# Altium PCB StrainLogger.PcbDoc (part 2 of 2)
Units mm, origin at the board's own origin, x right, y up, seen from the top; angles counter-clockwise.
Board outline 45 x 79 mm, 2 copper layers (Top Layer, Bottom Layer), stack 1.58 mm thick; 171 components, 91 nets, 490 pads, 131 vias.
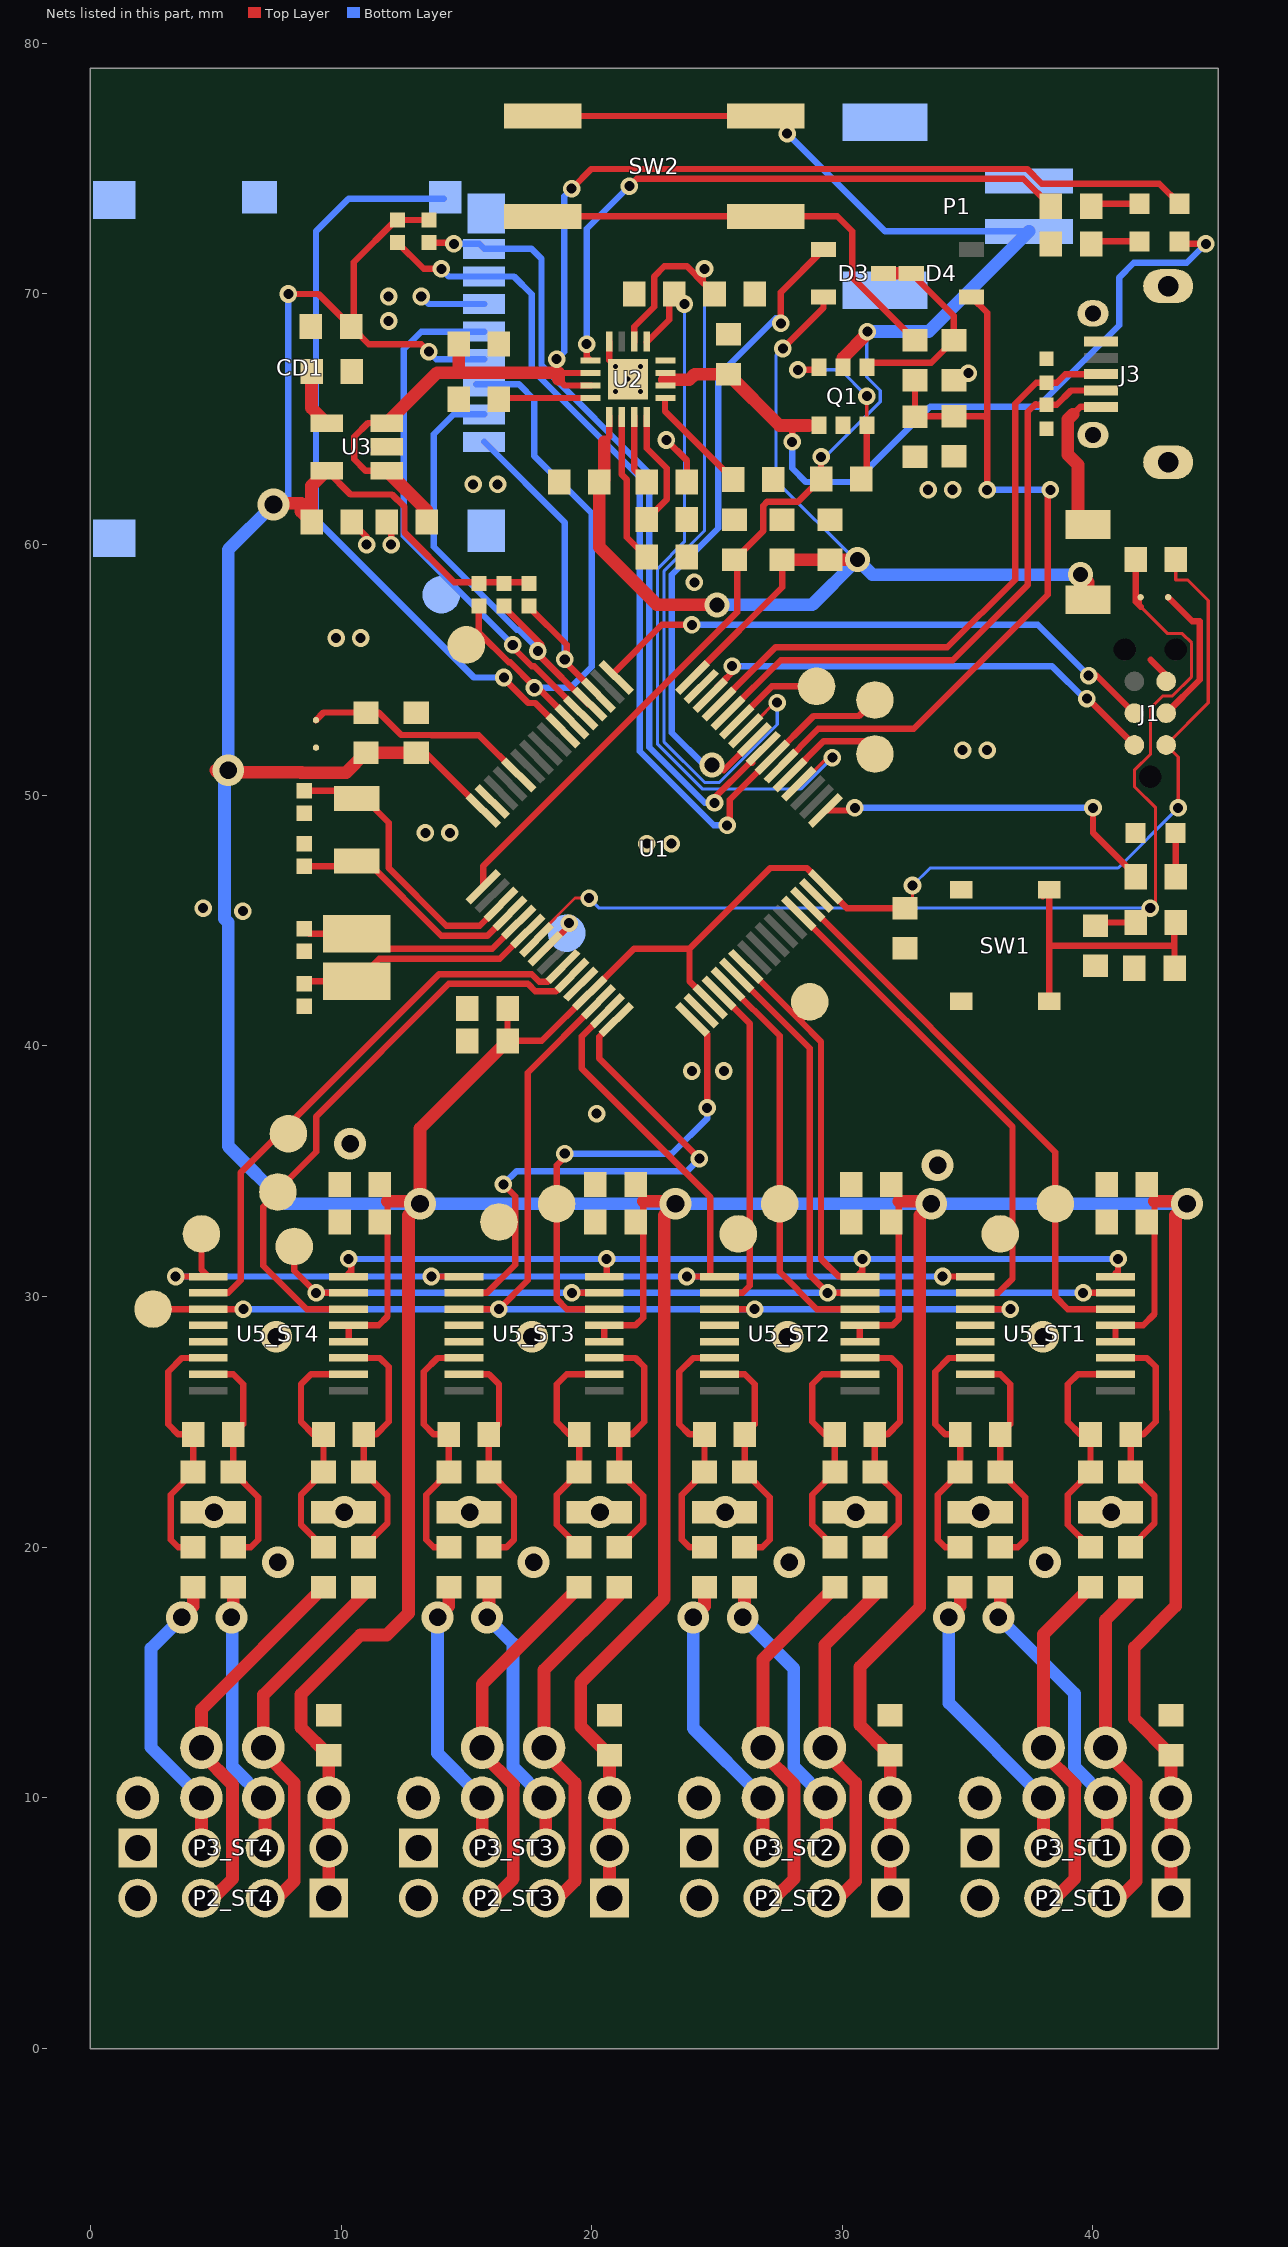
[diagram p2: the nets of this part, all layers, seen from the top]

## Part data
C1 C18 C19 C20 C22: library part CAP_0603, "CAP 100nF 6.3V 20% X7R 0603", Category=capacitor, Created=2018-07-01, Created by=JS, Last Modified=2018-07-01
C2: library part CAP_0603, "CAP 22nF 6.3V 20% X7R 0603", Category=capacitor, Created=2018-07-01, Created by=JS, Last Modified=2018-07-01
C3: library part CAP_0603, "CAP 10pF 6.3V 20% NP0 0603", Category=capacitor, Created=2018-07-01, Created by=JS, Last Modified=2018-07-01
C4 C5: library part MCD-00674, "CAP 6.8pF 25V 4% NP0 0402", Manufacturer=YAGEO, Manufacturer_Part_Number=CC0402CRNPO9BN6R8, Package=C0402, ComponentLink1Description=Yageo_Capacitor_NP0_16V-to-50V.pdf, ComponentLink1URL=http://tunmcdsvn.tun.st.com/Component_Datasheet_Library/Trunk/Capacitors/Yageo_Capacitor_NP0_16V-to-50V.pdf, ECCN_EU=n/a, ECCN_US=n/a, Initial_Board_Reference=mb1319, Internal_Part_Number=MCD-00674, Part_Type=Capacitor, Provided_By=Subcon, Status=Released
C6 C7: library part MCD-00004, "CAP 8.2pF 25V 4% NP0 0402", Manufacturer=AVX, Manufacturer_Part_Number=04025A8R2CAT2A, Package=0402, ComponentLink1Description=AVX_Capacitor_C0G-NP0-series.pdf, ECCN_EU=n/a, ECCN_US=n/a, Initial_Board_Reference=mb1274, Internal_Part_Number=MCD-00004, Part_Type=Capacitor, Provided_By=Subcon, Status=Released
C8: library part CAP_0603, "CAP 1uF 10V 20% X7R 0603", Category=capacitor, Created=2018-07-01, Created by=JS, Last Modified=2018-07-01
C9 C11 C13 C17: library part CAP_0603, "CAP 4.7uF 6.3V 20% X7R 0603", Category=capacitor, Created=2018-07-01, Created by=JS, Last Modified=2018-07-01
C10 C14_ST1 C14_ST2 C14_ST3 C14_ST4 C15_ST1 C15_ST2 C15_ST3 C15_ST4 C16 C21 C24_ST1 C24_ST2 C24_ST3 C24_ST4: library part CAP_0603, "CAP 1uF 6.3V 20% X7R 0603", Category=capacitor, Created=2018-07-01, Created by=JS, Last Modified=2018-07-01
C12 C25_ST1 C25_ST2 C25_ST3 C25_ST4 C26_ST1 C26_ST2 C26_ST3 C26_ST4 C27_ST1 C27_ST2 C27_ST3 C27_ST4 C28_ST1 C28_ST2 C28_ST3 C28_ST4 C32_ST1 C32_ST2 C32_ST3 C32_ST4 C35_ST1 C35_ST2 C35_ST3 C35_ST4: library part CAP_0603, "CAP 10nF 6.3V 20% X7R 0603", Category=capacitor, Created=2018-07-01, Created by=JS, Last Modified=2018-07-01
C23: library part CAP_0603, "CAP 220nF 6.3V 20% X7R 0603", Category=capacitor, Created=2018-07-01, Created by=JS, Last Modified=2018-07-01
CD1: library part MOLEX_CN-SD-8-2SW-4S_B, "Micro SD Card Slot", Manufacturer=Molex, Manufacturer PN=502774-0891_V
D1 D2: library part CMP-2000-05189-1, "TVS, Polymeric ESD Suppressor, 12 V, -65 to 125 degC, 2-Pin SMD", Capacitance Value=0.04pF, Clamping Voltage=250V(Typ), Leakage Current=0.001uA, Manufacturer=Littelfuse, Operating Temperature Classification=Military, Operating Temperature Max Deg. C=125C, Operating Temperature Min Deg. C=-65C, Operating Temp Range=-65Cto125C, Package / Case=SMD, Reverse Stand-off Voltage=12V, Clamping Voltage (Max)=250V(Typ), Configuration=Single, Datasheet URL=https://datasheet.ciiva.com/5837/575761-5837954.pdf, Datasheet Version=May-09, Direction Type=Bi-Directional, Leakage Current (Max)=0.001uA, Manufacturer URL=http://www.littelfuse.com/, Mounting=SurfaceMount, Mounting Style=SurfaceMount, Number of Elements=1, Packaging=TapeandReel, Pin Count=2, Polarity=Bi-Directional, Product Depth (mm)=0.84mm, Product Height (mm)=0.36mm, Product Length (mm)=1.66mm, Rad Hardened=No, Suppressor Type=Polymer, Working Voltage=12V, Working Voltage (Max)=12V
D3 D4: library part ONSC-D-A1A2K3-3
F1: library part BEL_PTC_0ZCJ0200FF2C, "PTC RESET FUSE 6V 2A 1206"
J1: library part TC2030-CTX-NL
J2_ST1 J2_ST2 J2_ST3 J2_ST4 J4_ST1 J4_ST2 J4_ST3 J4_ST4 J5_ST1 J5_ST2 J5_ST3 J5_ST4 J6_ST1 J6_ST2 J6_ST3 J6_ST4 J7_ST1 J7_ST2 J7_ST3 J7_ST4 J8_ST1 J8_ST2 J8_ST3 J8_ST4: library part PIN_HEADER_1POS, "Pin Header 0.1\" 1pos"
J3: library part HIRO-ZX62D-B-5P8_V, "Micro-USB Connector, 9-Leads, Body 7.5x5.6mm, Pitch 0.65mm"
LED1: library part CMP-1426-00005-1, "SMD LED Blue 0603", Color=Yellow, Manufacturer="Wuerth Elektronik", PartNumber=150060YS75000, ComponentLink1Description="Manufacturer URL", ComponentLink1URL=http://www.we-online.com, ComponentLink2Description=Datasheet, ComponentLink2URL=http://katalog.we-online.com/led/datasheet/150060YS75000.pdf, PackageReference=0603_A
LED2: library part CMP-1426-00005-1, "SMD mono-color Chip LED, WL-SMCW, Yellow", Color=Yellow, Manufacturer="Wuerth Elektronik", PartNumber=150060YS75000, ComponentLink1Description="Manufacturer URL", ComponentLink1URL=http://www.we-online.com, ComponentLink2Description=Datasheet, ComponentLink2URL=http://katalog.we-online.com/led/datasheet/150060YS75000.pdf, PackageReference=0603_A
LED3: library part CMP-1426-00005-1, "SMD LED Green 0603", Color=Yellow, Manufacturer="Wuerth Elektronik", PartNumber=150060YS75000, ComponentLink1Description="Manufacturer URL", ComponentLink1URL=http://www.we-online.com, ComponentLink2Description=Datasheet, ComponentLink2URL=http://katalog.we-online.com/led/datasheet/150060YS75000.pdf, PackageReference=0603_A
P1: library part CMP-1755-00001-1, "Male Header, Pitch 2 mm, 1 x 2 Position, Height 5.5 mm, -25 to 85 degC, RoHS, Tape and Reel", Colour=Black, Current Rating="3 A", Max Operating Temperature=105degC, Min Operating Temperature=-65degC, Package Quantity=100, ComponentLink1Description="Manufacturer URL", ComponentLink1URL=http://www.jst.com/home2.html, ComponentLink2Description=Datasheet, ComponentLink2URL=http://www.jst-mfg.com/product/pdf/eng/ePH.pdf, Contact Finish=Lead, Contact Material=Bronze, Contact Plating=Tin, DatasheetVersion=Dec-12, Height="8.13 mm", Lead Pitch="0.1 inch", Length="101.19 mm", Mount="Through Hole", PackageDescription="Male Header, Pitch 2 mm, 1 x 2 Position, Height 5.5 mm", PackageReference=S2B-PH-SM4-TB(LF)(SN)-2, Packaging=Bulk, Pins=40, Radiation Hardening=No, RoHSCompliant=True, Width="2.34 mm"
P2_ST1 P2_ST2 P2_ST3 P2_ST4 P3_ST1 P3_ST2 P3_ST3 P3_ST4: library part MOLEX_KK100_RA_4P, "Right angle rectangular connector, KK100, 4pos", Manufacturer=Molex, Manufacturer PN=0022053041
Q1: library part VISHAY_Si3552DV, "N/P-Channel Mosfet 30V, 2.5A/-1.8A", Manufacturer=Vishay, Manufacturer PN=Si3552DV, Rds_N=85mOhm, Rds_P=165mOhm, Vgs(th)=1V, Vmax=30V
R1: library part RES_0603, "RES 56K 1/5W 0603", Category=resistor, Created=2018-07-01, Created by=JS, Last Modified=2018-07-01
R2 R5 R6: library part RES_0603, "RES 430R 1/5W 0603", Category=resistor, Created=2018-07-01, Created by=JS, Last Modified=2018-07-01
R3 R13: library part RES_0603, "RES 10K 1/5W 0603", Category=resistor, Created=2018-07-01, Created by=JS, Last Modified=2018-07-01
R4: library part RES_0603, "RES 1K 1/5W 0603", Category=resistor, Created=2018-07-01, Created by=JS, Last Modified=2018-07-01
R7: library part RES_0603, "RES 1.05K 1/5W 0603", Category=resistor, Created=2018-07-01, Created by=JS, Last Modified=2018-07-01
R8: library part RES_0603, "REMOVE", Category=resistor, Created=2018-07-01, Created by=JS, Last Modified=2018-07-01
R9: library part RES_0603, "RES 620R 1/5W 0603", Category=resistor, Created=2018-07-01, Created by=JS, Last Modified=2018-07-01
R10: library part RES_0603, "RES 4.3K 1/5W 0603", Category=resistor, Created=2018-07-01, Created by=JS, Last Modified=2018-07-01
R11 R12 R14 R15 R17: library part RES_0603, "RES 100K 1/5W 0603", Category=resistor, Created=2018-07-01, Created by=JS, Last Modified=2018-07-01
R16: library part RES_0603, "RES 18K 1/5W 0603", Category=resistor, Created=2018-07-01, Created by=JS, Last Modified=2018-07-01
R18_ST1 R18_ST2 R18_ST3 R18_ST4 R19_ST1 R19_ST2 R19_ST3 R19_ST4 R28_ST1 R28_ST2 R28_ST3 R28_ST4 R29_ST1 R29_ST2 R29_ST3 R29_ST4: library part RES_0603, "RES 100R 1/5W 0603", Category=resistor, Created=2018-07-01, Created by=JS, Last Modified=2018-07-01
R20 R21 R22 R23 R24: library part RES_0402, "RES 10K 1/5W 0402", Category=resistor, Created=2018-09-12, Created by=JS, Last Modified=2018-09-12
SB1 SB2: "Solder Bridge ON", ECCN_EU=n/a, ECCN_US=n/a, Initial_Board_Reference=mb1274, Internal_Part_Number=MCD-00071, Part_Type=Mechanical, Provided_By=Subcon, Status=Released
SW1: library part E-SWITCH_TL3315NF160Q, "SWITCH TACTILE SPST-NO 0.05A 15V"
SW2: library part E-Switch_TL6120DF300QG, "SWITCH TACTILE SPST-NO 0.05A 50V, Body=7.4x7.4mm", Manufacturer=E-Switch, Manufacturer PN=TL6120DF300QG
TP1 TP2 TP3 TP4 TP5 TP6 TP7 TP8 TP9 TP10_ST1 TP10_ST2 TP10_ST3 TP10_ST4 TP11_ST1 TP11_ST2 TP11_ST3 TP11_ST4 TP12: "Test Point"
  TP1: PCB_Label=PC0
  TP2: PCB_Label=SYNC
  TP3 TP4 TP5 TP6 TP7 TP8 TP9 TP10_ST1 TP10_ST2 TP10_ST3 TP10_ST4 TP11_ST1 TP11_ST2 TP11_ST3 TP11_ST4 TP12: PCB_Label=ADC_CLK
U1: "Microcontroller 256_STM32L433 . LQFP64 package", Manufacturer=STMICROELECTRONICS, ECCN_EU=NEC, ECCN_US=3A991A2, Initial_Board_Reference=mb1319, Internal_Part_Number=MCD-00548, Manufacturer_Part_Number=STM32L433RCT6, Part_Type=IC, Provided_By=STM, Status="Symbol available"
U2: "PMIC 1.5A Li-Ion Battery Charger", Manufacturer=TI, Manufacturer PN=BQ24074RGT16
U3: library part CMP-0395-00250-1, "Single Output Low Noise LDO, 400 mA, Fixed 3.3 V Output, 1.7 to 5.5 V Input, with Reverse Current Protection, 5-pin SOT-23 (DBV), -40 to 85 degC,", Manufacturer="Texas Instruments", Rating=Catalog, Accuracy(%)=1, Code_JEDEC=MO-178, ComponentLink1Description="Manufacturer URL", ComponentLink1URL=http://www.ti.com/, ComponentLink2Description=Datasheet, ComponentLink2URL=http://www.ti.com/general/docs/lit/getliterature.tsp?genericPartNumber=TPS73633&fileType=pdf, ComponentLink3Description="Package Specification", ComponentLink3URL=http://www.ti.com/litv/pdf/mpds018i, ComponentLink4Description="URL Link1", ComponentLink4URL="Samples URL:http://www.ti.com/product/tps73633#samples", DatasheetVersion=SBVS038T, Eco-Plan="Green (RoHS & no Sb/Br)", Fixed Output Options(V)=3.3, Iout(Max)(A)=0.4, Iq(Typ)(mA)=0.3, Mounting Technology="Surface Mount", PackageDescription="5-Pin Plastic Small Outline, Body 1.60 Ã— 2.90 mm, Pitch 0.95 mm", PackageReference=DBV5, PackageVersion=4073253-4/K, PartNumber=TPS73633DBVTG4, SubFamily="Single Channel LDO", Vdo(Typ)(mV)=75, Vin(Max)(V)=5.5, Vin(Min)(V)=1.7, Vout Adj(Max)(V)=3.3, Vout Adj(Min)(V)=3.3
U5_ST1 U5_ST2 U5_ST3 U5_ST4: library part TI_ADS1220IPWR, "ADS1220 4-Channel, 2-kSPS, Low-Power, 24-Bit ADC with Integrated PGA and Reference", Manufacturer=TI, Manufacturer PN=ADS1220IPWR
X1: "Crystal 32.768kHz, 6pF, -+20PPM, R=50K, SMD", Manufacturer=NDK, Manufacturer_Part_Number="NX3215SA 32.768KHz EXS00A-MU00525", ComponentLink1Description="NDK_Crystal-For-ST_NX3215SA 32.768KHz EXS00A-MU00525 (EXS10B-21238).pdf", ECCN_EU=NEC, ECCN_US=EAR99, Initial_Board_Reference=mb1274, Internal_Part_Number=MCD-00091, Part_Type=Crystal_Osc, Provided_By=STM, Status=Released
X2: "Crystal 8Mhz, 8pF, -+50PPM, SMD", Manufacturer=NDK, Manufacturer_Part_Number="NX3225GD 8MHz EXS00A-CG04874", ComponentLink1Description="NDK_Crystal-For-ST_NX3225GD 8MHz EXS00A-CG04874 (EXS10B-20725).pdf", ECCN_EU=NEC, ECCN_US=EAR99, Initial_Board_Reference=mb1274, Internal_Part_Number=MCD-00092, Part_Type=Crystal_Osc, Provided_By=STM, Status=Released

## Via types
v1: diameter 0.7, hole 0.4, Top Layer to Bottom Layer, 78 vias
v2: diameter 1.27, hole 0.7, Top Layer to Bottom Layer, 25 vias
v3: diameter 0.7, hole 0.4, Top Layer to Bottom Layer, tented both sides, 8 vias
v4: diameter 1.27, hole 0.711, Top Layer to Bottom Layer, 5 vias
v5: diameter 0.5, hole 0.2, Top Layer to Bottom Layer, tented top, 5 vias
v6: diameter 3, hole 2.2, Top Layer to Bottom Layer, 4 vias
v7: diameter 1, hole 0.6, Top Layer to Bottom Layer, 4 vias
v8: diameter 1.27, hole 0.7, Top Layer to Bottom Layer, tented both sides, 2 vias

## Nets (pads, with @x,y where several pads share a name; then routed paths per layer and width w, separated by ;. In a path a pad name is that pad's centre, name@x,y a point inside that pad or via, vN(x,y) a via of type N, cw(c..) or ccw(c..) an arc to the next point about the centre after c; other vN are vias at no path point)
#RST_2: C2.2 R1.1 R4.2 SB1.2 U1.7 | length 45.5
  Top Layer w0.127: U1.7@17.798,44.233 17.798,44.362 19.336,45.9 v1(19.9,45.9) ; R4.2@41.7,44.925 41.71,44.925 v1(42.285,45.5) ; SB1.2@41.9,57.9 41.9,57.525 42.975,56.45 43.564,56.45 43.936,56.078 43.936,54.735 43.162,53.961 42.78,53.961 42.3,53.481 42.3,51.648 41.65,50.998 41.65,50.35 42.5,49.5 v1@42.5,45.5
  Top Layer w0.254: C2.2@40.1,44.8 40.225,44.925 R4.2@41.7,44.925 ; 41.9,57.525 41.7,57.725 R1.1@41.7,59.4 R1.1@41.9,59.2
  Bottom Layer w0.127: v1(19.9,45.9) 20.3,45.5 v1(42.285,45.5) v1@42.5,45.5
#RST_FL_2: C3.2 R4.1 SW1.1 SW1.2 | length 11.6
  Top Layer w0.254: SW1.1@38,45.975 SW1.1@38.25,46.225 38.25,44 ; SW1.2@38.25,41.775 38.25,44 ; C3.2@43.254,43.1 43.254,43.989 43.243,44 ; R4.1@43.3,44.925 43.243,44.868 43.243,44 ; 38.25,44 43.243,44
ADC_CLK_2: TP3.1 U1.14 U5_ST1.3 U5_ST2.3 U5_ST3.3 U5_ST4.3 | length 52.3
  Top Layer w0.254: TP3.1@2.5,29.5 U5_ST4.3@4.7,29.5 v1(6.1,29.5) ; U5_ST3.3@14.9,29.5 v1(16.3,29.5) 17.45,30.65 17.45,38.936 U1.14@20.273,41.759 ; U5_ST2.3@25.1,29.5 v1(26.5,29.5) ; U5_ST1.3@35.3,29.5 v1(36.7,29.5)
  Bottom Layer w0.254: v1(6.1,29.5) v1(16.3,29.5) v1(26.5,29.5) v1(36.7,29.5)
AIN0_ST1: C25_ST1.2 C32_ST1.1 R18_ST1.2 U5_ST1.11 | length 10.4
  Top Layer w0.254: U5_ST1.11@40.9,27.55 42.15,27.55 42.5,27.2 42.5,25 42,24.5 C25_ST1.2@41.5,24.5 C32_ST1.1@41.5,23 42.454,22.046 42.454,20.954 R18_ST1.2@41.5,20
AIN0_ST2: C25_ST2.2 C32_ST2.1 R18_ST2.2 U5_ST2.11 | length 10.4
  Top Layer w0.254: U5_ST2.11@30.7,27.55 31.95,27.55 32.3,27.2 32.3,25 31.8,24.5 C25_ST2.2@31.3,24.5 C32_ST2.1@31.3,23 32.254,22.046 32.254,20.954 R18_ST2.2@31.3,20
AIN0_ST3: C25_ST3.2 C32_ST3.1 R18_ST3.2 U5_ST3.11 | length 10.4
  Top Layer w0.254: U5_ST3.11@20.5,27.55 21.75,27.55 22.1,27.2 22.1,25 21.6,24.5 C25_ST3.2@21.1,24.5 C32_ST3.1@21.1,23 22.054,22.046 22.054,20.954 R18_ST3.2@21.1,20
AIN0_ST4: C25_ST4.2 C32_ST4.1 R18_ST4.2 U5_ST4.11 | length 10.4
  Top Layer w0.254: U5_ST4.11@10.3,27.55 11.55,27.55 11.9,27.2 11.9,25 11.4,24.5 C25_ST4.2@10.9,24.5 C32_ST4.1@10.9,23 11.854,22.046 11.854,20.954 R18_ST4.2@10.9,20
AIN1_ST1: C25_ST1.1 C26_ST1.1 R28_ST1.2 U5_ST1.10 | length 9.9
  Top Layer w0.254: R28_ST1.2@39.9,20 39,20.9 39,22.1 C26_ST1.1@39.9,23 C25_ST1.1@39.9,24.5 39.5,24.5 39,25 39,26.5 39.4,26.9 U5_ST1.10@40.9,26.9
AIN1_ST2: C25_ST2.1 C26_ST2.1 R28_ST2.2 U5_ST2.10 | length 9.9
  Top Layer w0.254: R28_ST2.2@29.7,20 28.8,20.9 28.8,22.1 C26_ST2.1@29.7,23 C25_ST2.1@29.7,24.5 29.3,24.5 28.8,25 28.8,26.5 29.2,26.9 U5_ST2.10@30.7,26.9
AIN1_ST3: C25_ST3.1 C26_ST3.1 R28_ST3.2 U5_ST3.10 | length 9.9
  Top Layer w0.254: R28_ST3.2@19.5,20 18.6,20.9 18.6,22.1 C26_ST3.1@19.5,23 C25_ST3.1@19.5,24.5 19.1,24.5 18.6,25 18.6,26.5 19,26.9 U5_ST3.10@20.5,26.9
AIN1_ST4: C25_ST4.1 C26_ST4.1 R28_ST4.2 U5_ST4.10 | length 9.9
  Top Layer w0.254: R28_ST4.2@9.3,20 8.4,20.9 8.4,22.1 C26_ST4.1@9.3,23 C25_ST4.1@9.3,24.5 8.9,24.5 8.4,25 8.4,26.5 8.8,26.9 U5_ST4.10@10.3,26.9
AIN2_ST1: C27_ST1.2 C28_ST1.1 R29_ST1.2 U5_ST1.7 | length 9.5
  Top Layer w0.254: U5_ST1.7@35.3,26.9 36.3,26.9 36.7,26.5 36.7,24.9 C27_ST1.2@36.3,24.5 C28_ST1.1@36.3,23 37.3,22 37.3,20.3 37,20 R29_ST1.2@36.3,20
AIN2_ST2: C27_ST2.2 C28_ST2.1 R29_ST2.2 U5_ST2.7 | length 9.5
  Top Layer w0.254: U5_ST2.7@25.1,26.9 26.1,26.9 26.5,26.5 26.5,24.9 C27_ST2.2@26.1,24.5 C28_ST2.1@26.1,23 27.1,22 27.1,20.3 26.8,20 R29_ST2.2@26.1,20
AIN2_ST3: C27_ST3.2 C28_ST3.1 R29_ST3.2 U5_ST3.7 | length 9.5
  Top Layer w0.254: U5_ST3.7@14.9,26.9 15.9,26.9 16.3,26.5 16.3,24.9 C27_ST3.2@15.9,24.5 C28_ST3.1@15.9,23 16.9,22 16.9,20.3 16.6,20 R29_ST3.2@15.9,20
AIN2_ST4: C27_ST4.2 C28_ST4.1 R29_ST4.2 U5_ST4.7 | length 9.5
  Top Layer w0.254: U5_ST4.7@4.7,26.9 5.7,26.9 6.1,26.5 6.1,24.9 C27_ST4.2@5.7,24.5 C28_ST4.1@5.7,23 6.7,22 6.7,20.3 6.4,20 R29_ST4.2@5.7,20
AIN3_ST1: C27_ST1.1 C35_ST1.2 R19_ST1.2 U5_ST1.6 | length 10.7
  Top Layer w0.254: R19_ST1.2@34.7,20 34.1,20 33.8,20.3 33.8,22.1 C35_ST1.2@34.7,23 C27_ST1.1@34.7,24.5 34.1,24.5 33.7,24.9 33.7,27 34.25,27.55 U5_ST1.6@35.3,27.55
AIN3_ST2: C27_ST2.1 C35_ST2.2 R19_ST2.2 U5_ST2.6 | length 10.7
  Top Layer w0.254: R19_ST2.2@24.5,20 23.9,20 23.6,20.3 23.6,22.1 C35_ST2.2@24.5,23 C27_ST2.1@24.5,24.5 23.9,24.5 23.5,24.9 23.5,27 24.05,27.55 U5_ST2.6@25.1,27.55
AIN3_ST3: C27_ST3.1 C35_ST3.2 R19_ST3.2 U5_ST3.6 | length 10.7
  Top Layer w0.254: R19_ST3.2@14.3,20 13.7,20 13.4,20.3 13.4,22.1 C35_ST3.2@14.3,23 C27_ST3.1@14.3,24.5 13.7,24.5 13.3,24.9 13.3,27 13.85,27.55 U5_ST3.6@14.9,27.55
AIN3_ST4: C27_ST4.1 C35_ST4.2 R19_ST4.2 U5_ST4.6 | length 10.7
  Top Layer w0.254: R19_ST4.2@4.1,20 3.5,20 3.2,20.3 3.2,22.1 C35_ST4.2@4.1,23 C27_ST4.1@4.1,24.5 3.5,24.5 3.1,24.9 3.1,27 3.65,27.55 U5_ST4.6@4.7,27.55
BOOT0_2: R3.1 SB2.1 U1.60 | length 8.7
  Top Layer w0.254: SB2.1@9,53 9.3,53.3 R3.1@11,53.3 ; 11.504,53.3 12.4,52.404 13.605,52.404 ; 13.609,52.4 15.5,52.4 U1.60@17.091,50.809
BR_VDD_ST1: C1.2 C11.2 C14_ST1.2 C14_ST2.2 C14_ST3.2 C14_ST4.2 C15_ST1.2 C15_ST2.2 C15_ST3.2 C15_ST4.2 C17.2 C18.2 C19.2 C20.2 C24_ST1.1 C24_ST2.1 C24_ST3.1 C24_ST4.1 CD1.4 J1.1 J2_ST1.1 J2_ST2.1 J2_ST3.1 J2_ST4.1 P2_ST1.1 P2_ST2.1 P2_ST3.1 P2_ST4.1 P3_ST1.4 P3_ST2.4 P3_ST3.4 P3_ST4.4 R1.2 R3.2 R20.2 R21.2 R22.2 R23.2 R24.2 U1.13 U1.19 U1.32 U1.64 U3.5 U5_ST1.12 U5_ST1.13 U5_ST2.12 U5_ST2.13 U5_ST3.12 U5_ST3.13 U5_ST4.12 U5_ST4.13 | length 323.7
  Top Layer w0.127: C18.2@32.5,45.5 32.8,45.5 v1(32.8,46.4) ; R1.2@43.3,59.4 43.3,58.591 43.779,58.591 44.6,57.769 44.6,53.685 J1.1@42.92,52.005 43.4,51.525 v1(43.4,49.5)
  Top Layer w0.254: v1@8,70 9.1,70 C1.2@10.4,68.7 ; U3.5@9.425,62.95 10.375,62 12.034,62 12.529,61.505 12.529,60.487 14.516,58.5 17.45,58.5 R22.2@17.5,58.45 ; U5_ST4.12@10.3,28.2 U5_ST4.13@10.3,28.85 11.5,28.85 11.854,29.204 11.854,33.8 11.854,34.171 C14_ST4.2@11.55,34.475 ; C19.2@13.186,51.886 U1.64@15.676,49.395 ; v1(13.5,67.7) 13.2,68 11.1,68 10.5,68.6 10.5,71.259 12.191,72.95 R24.2@12.25,72.95 R23.2@13.5,72.95 ; C17.2@16.643,41.5 C20.2@16.643,40.2 18.007,40.2 U1.13@19.919,42.112 21.687,43.88 23.9,43.88 ; U5_ST3.12@20.5,28.2 U5_ST3.13@20.5,28.85 21.75,28.85 22.054,29.154 22.054,34.171 C14_ST3.2@21.75,34.475 ; U1.19@24.727,41.759 23.9,42.586 23.9,43.88 ; U5_ST2.12@30.7,28.2 U5_ST2.13@30.7,28.85 32,28.85 32.254,29.104 32.254,33.8 32.254,34.171 C14_ST2.2@31.95,34.475 ; C18.2@32.5,45.5 30.178,45.5 U1.32@29.324,46.355 28.578,47.1 27.12,47.1 23.9,43.88 ; U5_ST1.12@40.9,28.2 U5_ST1.13@40.9,28.85 42,28.85 42.454,29.304 42.454,33.8
  Top Layer w0.508: v2@5,51 5.081,50.919 8.419,50.919 8.4,50.9 10.2,50.9 R3.2@11,51.7 C19.2@13,51.7 ; v4(7.3,61.6) 7.35,61.65 8.4,61.65 8.4,61.325 C11.2@8.825,60.9 8.825,62.35 U3.5@9.425,62.95 ; P2_ST4.1@9.51,6 P3_ST4.4@9.51,8 J2_ST4.1@9.51,10 C24_ST4.1@9.51,11.7 8.4,12.81 8.4,14.121 10.779,16.5 11.825,16.5 12.692,17.367 12.692,33.242 ; 11.854,33.8 v4@13.05,33.8 ; v4(13.15,33.7) 13.15,36.707 C20.2@16.643,40.2 ; P2_ST3.1@20.71,6 P3_ST3.4@20.71,8 J2_ST3.1@20.71,10 C24_ST3.1@20.71,11.7 19.566,12.844 19.566,14.616 22.892,17.942 22.892,33.242 v4(23.35,33.7) ; 22.054,33.8 v4@23.25,33.8 ; P2_ST2.1@31.91,6 P3_ST2.4@31.91,8 J2_ST2.1@31.91,10 C24_ST2.1@31.91,11.7 30.7,12.91 30.7,15.225 33.092,17.617 33.092,33.242 ; 32.254,33.8 v4@33.45,33.8 ; 42.454,33.8 43.65,33.8 v4(43.75,33.7) ; P2_ST1.1@43.11,6 P3_ST1.4@43.11,8 J2_ST1.1@43.11,10 C24_ST1.1@43.11,11.7 41.65,13.16 41.65,16 43.299,17.649 ; 43.292,33.242 43.299,17.65
  Bottom Layer w0.127: v1(32.8,46.4) 33.5,47.1 41,47.1 v1(43.4,49.5)
  Bottom Layer w0.254: v4@7.9,61.8 v1(7.9,70) ; v1(13.5,67.7) 13.8,67.4 CD1.4@15.71,67.4
  Bottom Layer w0.508: v4(7.3,61.6) 5.5,59.8 v2(5.5,51) 5.348,50.848 5.348,45.072 5.5,44.92 5.5,36 7.8,33.7 v4(13.15,33.7) v4(23.35,33.7) v4(43.75,33.7)
  other v4: 33.55,33.7
BRIDGE1_ST1_N: J5_ST1.1 P2_ST1.3 R28_ST1.1 | length 14.5
  Top Layer w0.508: P2_ST1.3@38.03,6 38.5,6 39.269,6.769 39.269,10.51 39.28,10.52 38.03,11.77 J5_ST1.1@38.03,12 38.03,16.53 R28_ST1.1@39.9,18.4
BRIDGE1_ST1_P: J4_ST1.1 P2_ST1.2 R18_ST1.1 | length 14.8
  Top Layer w0.508: P2_ST1.2@40.57,6 40.57,5.52 41.731,6.681 41.731,10.594 40.5,11.825 40.5,17.1 41.5,18.1 R18_ST1.1@41.5,18.4
BRIDGE1_ST2_N: J5_ST2.1 P2_ST2.3 R28_ST2.1 | length 14.9
  Top Layer w0.508: P2_ST2.3@26.83,6 27.3,6 28.069,6.769 28.069,10.51 28.08,10.52 26.83,11.77 J5_ST2.1@26.83,12 26.83,15.53 R28_ST2.1@29.7,18.4
BRIDGE1_ST2_P: J4_ST2.1 P2_ST2.2 R18_ST2.1 | length 15.2
  Top Layer w0.508: P2_ST2.2@29.37,6 29.37,5.52 30.531,6.681 30.531,10.594 29.3,11.825 J4_ST2.1@29.3,12 29.3,16.1 31.3,18.1 R18_ST2.1@31.3,18.4
BRIDGE1_ST3_N: J5_ST3.1 P2_ST3.3 R28_ST3.1 | length 15.3
  Top Layer w0.508: P2_ST3.3@15.63,6 16.1,6 16.869,6.769 16.869,10.51 16.88,10.52 15.63,11.77 J5_ST3.1@15.63,12 15.63,14.53 R28_ST3.1@19.5,18.4
BRIDGE1_ST3_P: J4_ST3.1 P2_ST3.2 R18_ST3.1 | length 15.6
  Top Layer w0.508: P2_ST3.2@18.17,6 18.17,5.52 19.331,6.681 19.331,10.594 18.1,11.825 J4_ST3.1@18.1,12 18.1,15.1 21.1,18.1 R18_ST3.1@21.1,18.4
BRIDGE1_ST4_N: J5_ST4.1 P2_ST4.3 R28_ST4.1 | length 15.7
  Top Layer w0.508: P2_ST4.3@4.43,6 4.9,6 5.669,6.769 5.669,10.51 5.68,10.52 4.43,11.77 J5_ST4.1@4.43,12 4.43,13.53 R28_ST4.1@9.3,18.4
BRIDGE1_ST4_P: J4_ST4.1 P2_ST4.2 R18_ST4.1 | length 16
  Top Layer w0.508: P2_ST4.2@6.97,6 6.97,5.52 8.131,6.681 8.131,10.594 6.9,11.825 J4_ST4.1@6.9,12 6.9,14.1 10.9,18.1 R18_ST4.1@10.9,18.4
BRIDGE2_ST1_N: J7_ST1.1 P3_ST1.2 R19_ST1.1 | length 12.2
  Top Layer w0.508: v2(34.25,17.2) 34.7,17.65 R19_ST1.1@34.7,18.4 ; P3_ST1.2@38.03,8 J7_ST1.1@38.03,10
  Bottom Layer w0.508: v2(34.25,17.2) 34.25,13.78 J7_ST1.1@38.03,10
BRIDGE2_ST1_P: J6_ST1.1 P3_ST1.3 R29_ST1.1 | length 12.2
  Top Layer w0.508: v2(36.225,17.2) 36.3,17.275 R29_ST1.1@36.3,18.4 ; J6_ST1.1@40.5,10 40.57,9.93 P3_ST1.3@40.57,8
  Bottom Layer w0.508: v2(36.225,17.2) 39.261,14.164 39.261,11.239 J6_ST1.1@40.5,10
BRIDGE2_ST2_N: J7_ST2.1 P3_ST2.2 R19_ST2.1 | length 11.7
  Top Layer w0.508: v2(24.05,17.2) 24.5,17.65 R19_ST2.1@24.5,18.4 ; P3_ST2.2@26.83,8 J7_ST2.1@26.83,10
  Bottom Layer w0.508: v2(24.05,17.2) 24.05,12.78 J7_ST2.1@26.83,10
BRIDGE2_ST2_P: J6_ST2.1 P3_ST2.3 R29_ST2.1 | length 11.8
  Top Layer w0.508: v2(26.025,17.2) 26.1,17.275 R29_ST2.1@26.1,18.4 ; J6_ST2.1@29.3,10 29.37,9.93 P3_ST2.3@29.37,8
  Bottom Layer w0.508: v2(26.025,17.2) 28.061,15.164 28.061,11.239 J6_ST2.1@29.3,10
BRIDGE2_ST3_N: J7_ST3.1 P3_ST3.2 R19_ST3.1 | length 11.3
  Top Layer w0.508: v2(13.85,17.2) 14.3,17.65 R19_ST3.1@14.3,18.4 ; P3_ST3.2@15.63,8 J7_ST3.1@15.63,10
  Bottom Layer w0.508: v2(13.85,17.2) 13.85,11.78 J7_ST3.1@15.63,10
BRIDGE2_ST3_P: J6_ST3.1 P3_ST3.3 R29_ST3.1 | length 11.4
  Top Layer w0.508: v2(15.825,17.2) 15.9,17.275 R29_ST3.1@15.9,18.4 ; J6_ST3.1@18.1,10 18.17,9.93 P3_ST3.3@18.17,8
  Bottom Layer w0.508: v2(15.825,17.2) 16.861,16.164 16.861,11.239 J6_ST3.1@18.1,10
BRIDGE2_ST4_N: J7_ST4.1 P3_ST4.2 R19_ST4.1 | length 11.9
  Top Layer w0.508: v2(3.65,17.2) 4.1,17.65 R19_ST4.1@4.1,18.4 ; P3_ST4.2@4.43,8 J7_ST4.1@4.43,10
  Bottom Layer w0.508: v2(3.65,17.2) 2.415,15.965 2.415,12.015 J7_ST4.1@4.43,10
BRIDGE2_ST4_P: J6_ST4.1 P3_ST4.3 R29_ST4.1 | length 11
  Top Layer w0.508: v2(5.625,17.2) 5.7,17.275 R29_ST4.1@5.7,18.4 ; J6_ST4.1@6.9,10 6.97,9.93 P3_ST4.3@6.97,8
  Bottom Layer w0.508: v2(5.625,17.2) 5.661,17.164 5.661,11.239 J6_ST4.1@6.9,10
BUTTON: C23.2 D4.1 R16.2 R17.2 U1.38 | length 32.6
  Top Layer w0.254: U1.38@27.556,51.163 29.045,52.652 31.716,52.652 31.718,52.65 32.85,52.65 38.2,58 38.2,62 v1@38.3,62.1 ; R16.2@32.9,66.55 C23.2@32.9,65.1 32.925,65.125 R17.2@34.45,65.125 35.655,65.125 35.78,65 ; D4.1@35.15,69.875 35.78,69.245 35.78,65 ; v1@35.78,62.1 35.78,65
  Bottom Layer w0.254: v1(35.78,62.189) v1(38.3,62.189)
DRDY#1: TP11_ST1.1 U1.30 U5_ST1.14 | length 22.3
  Top Layer w0.254: U1.30@28.616,45.648 38.5,35.764 TP11_ST1.1@38.5,33.7 38.5,30 39,29.5 U5_ST1.14@40.9,29.5
DRDY#2: TP11_ST2.1 U1.21 U5_ST2.14 | length 16.2
  Top Layer w0.254: U1.21@25.434,42.466 27.5,40.4 TP11_ST2.1@27.5,33.7 27.5,30.984 28.984,29.5 U5_ST2.14@30.7,29.5
DRDY#3: TP11_ST3.1 U1.17 U5_ST3.14 | length 18.2
  Top Layer w0.254: v3@18.858,35.5 18.6,35.242 TP11_ST3.1@18.6,33.7 18.6,29.905 19.005,29.5 19.5,29.5 U5_ST3.14@20.5,29.5 ; U1.17@24.02,41.051 24.604,40.468 v3(24.604,37.531)
  Bottom Layer w0.254: v3(18.925,35.7) 23.2,35.7 24.604,37.104 v3(24.604,37.531)
DRDY#4: TP11_ST4.1 U1.11 U5_ST4.14 | length 24.4
  Top Layer w0.254: U5_ST4.14@10.3,29.5 8.631,29.5 6.9,31.231 6.9,33.59 7.355,34.045 7.705,33.695 7.831,33.821 7.831,34.601 9.009,35.78 9.009,37.184 14.3,42.475 17.456,42.475 17.747,42.184 18.577,42.184 U1.11@19.212,42.819
DRDY_TIM_2: TP12.1 U1.43 | length 3.8
  Top Layer w0.254: U1.43@25.788,52.931 25.788,52.942 27.191,54.345 TP12.1@28.97,54.345
GND: C1.1 C2.1 C3.1 C4.2 C5.2 C6.1 C7.1 C8.1 C9.1 C10.1 C11.1 C12.1 C13.1 C14_ST1.1 C14_ST2.1 C14_ST3.1 C14_ST4.1 C15_ST1.1 C15_ST2.1 C15_ST3.1 C15_ST4.1 C16.1 C17.1 C18.1 C19.1 C20.1 C21.1 C22.1 C23.1 C24_ST1.2 C24_ST2.2 C24_ST3.2 C24_ST4.2 C26_ST1.2 C26_ST2.2 C26_ST3.2 C26_ST4.2 C28_ST1.2 C28_ST2.2 C28_ST3.2 C28_ST4.2 C32_ST1.2 C32_ST2.2 C32_ST3.2 C32_ST4.2 C35_ST1.1 C35_ST2.1 C35_ST3.1 C35_ST4.1 CD1.6 CD1.10 CD1.11 CD1.12 CD1.13 CD1.14 D1.1 D2.1 J1.5 J3.5 J3.6 J3.7 J3.8 J3.9 J8_ST1.1 J8_ST2.1 J8_ST3.1 J8_ST4.1 LED1.1 P1.2 P1.MP1 P1.MP2 P2_ST1.4 P2_ST2.4 P2_ST3.4 P2_ST4.4 P3_ST1.1 P3_ST2.1 P3_ST3.1 P3_ST4.1 Q1.5 R6.1 R7.1 R8.1 R9.1 R10.2 R11.1 R12.2 R13.1 R15.1 R17.1 SB2.2 SW1.3 SW1.4 U1.12 U1.18 U1.31 U1.47 U1.63 U2.4 U2.8 U2.17 U3.2 U5_ST1.4 U5_ST1.5 U5_ST2.4 U5_ST2.5 U5_ST3.4 U5_ST3.5 U5_ST4.4 U5_ST4.5 | length 16.1
  Top Layer w0.254: C26_ST4.2@9.3,21.4 v2(10.131,21.4) C32_ST4.2@10.9,21.4 ; C11.1@10.425,60.9 11.023,60.302 v1(11.023,60) ; C10.1@11.825,60.9 12,60.725 v1(12,60) ; C26_ST3.2@19.5,21.4 v2(20.331,21.4) C32_ST3.2@21.1,21.4 ; U2.8@20.7,68.1 20.7,67.35 v5(21.45,66.6) ; v1(22.979,64.175) 23.8,63.354 R8.1@23.8,62.5 ; C26_ST2.2@29.7,21.4 v2(30.531,21.4) C32_ST2.2@31.3,21.4 ; C26_ST1.2@39.9,21.4 v2(40.731,21.4) C32_ST1.2@41.5,21.4 ; 42.3,55.4 42.92,54.78 J1.5@42.92,54.545
  Bottom Layer w0.254: v1(13.2,69.9) 13.5,69.6 CD1.6@15.71,69.6
  other v1: 6.079,45.375 4.5,45.5 22.202,48.075 23.179,48.075 13.361,48.5 14.338,48.5 34.803,51.8 35.78,51.8 9.802,56.275 10.779,56.275 24.1,58.497 33.423,62.189 34.4,62.189 15.273,62.4 16.25,62.4 35.03,66.839 11.9,68.923 11.9,69.9
  other v2: 7.481,19.4 17.681,19.4 27.881,19.4 38.081,19.4 4.931,21.4 15.131,21.4 25.331,21.4 35.531,21.4 7.412,28.4 17.612,28.4 27.812,28.4 38.012,28.4
  other v3: 20.2,37.3 24,39 25.271,39
  other v5: 20.95,66.1 21.95,66.1 20.95,67.1 21.95,67.1
  other v8: 33.8,35.242 10.362,36.1
HFXO_1_2: C6.2 U1.5 X2.1 | length 9.3
  Top Layer w0.254: C6.2@8.525,44.675 8.725,44.475 X2.1@10.625,44.475 11.22,43.88 16.03,43.88 U1.5@17.091,44.94
HFXO_2_2: C7.2 U1.6 X2.2 | length 9.8
  Top Layer w0.254: C7.2@8.525,42.475 8.625,42.575 X2.2@10.625,42.575 11.521,43.471 16.328,43.471 U1.6@17.444,44.587
LED_STAT_2: R2.2 U1.33 | length 13.8
  Top Layer w0.254: U1.33@29.324,49.395 30.395,49.395 v1(30.5,49.5) ; v1(40,49.5) 40,48.5 R2.2@41.5,47
  Bottom Layer w0.254: v1(30.5,49.5) v1(40,49.5)
LFXO_1_2: C4.1 U1.3 X1.1 | length 11.5
  Top Layer w0.254: C4.1@8.525,50.175 10.325,50.175 X1.1@10.625,49.875 10.925,49.875 11.9,48.9 11.9,47.1 14.2,44.8 15.536,44.8 U1.3@16.384,45.648
LFXO_2_2: C5.1 U1.4 X1.2 | length 9.9
  Top Layer w0.254: C5.1@8.525,47.175 10.425,47.175 X1.2@10.625,47.375 11.025,47.375 14,44.4 15.843,44.4 U1.4@16.737,45.294
NetC9_2: C9.2 C10.2 LED2.2 U2.10 U2.11 U3.1 U3.3 | length 51.2
  Top Layer w0.254: U3.1@11.825,62.95 10.975,62.95 10.525,63.4 10.525,64.3 11.075,64.85 U3.3@11.825,64.85 ; 18.6,66.9 v1(18.6,67.4) ; 18.675,66.6 18.925,66.35 U2.11@19.975,66.35 ; 18.675,66.863 18.688,66.85 U2.10@19.975,66.85 ; v1(19.2,74.2) 19.985,74.985 37.376,74.985 37.961,74.4 42.65,74.4 LED2.2@43.45,73.6 ; LED2.2@43.45,73.55 LED2.2@43.5,73.6
  Top Layer w0.508: U3.1@11.825,62.95 13.425,61.35 C10.2@13.425,60.9 ; U3.3@11.825,64.85 13.838,66.863 14.7,66.863 ; C9.2@14.7,68 14.7,66.863 ; 18.675,66.6 18.675,66.863 14.7,66.863
  Bottom Layer w0.254: v1(18.6,67.4) 18.9,67.7 18.9,73.9 v1(19.2,74.2)
NetC12_2: C12.2 U3.4 | length 2.3
  Top Layer w0.508: C12.2@8.825,66.9 8.825,65.45 U3.4@9.425,64.85
NetD3_3: D3.3 D4.3 Q1.1 R15.2 | length 8.4
  Top Layer w0.254: Q1.1@30.975,67.075 31.154,67.254 33.554,67.254 R15.2@34.45,68.15 34.45,69.125 D4.3@32.75,70.825
  Top Layer w0.508: D3.3@31.65,70.825 D4.3@32.75,70.825
NetF1_1: F1.1 J3.1 | length 5.9
  Top Layer w0.254: 39.2,65.2 39.5,65.5 J3.1@40.325,65.5
  Top Layer w0.508: 39.2,65.2 38.994,64.994 38.994,63.594 39.4,63.188 F1.1@39.4,60.8
NetJ1_3: J1.3 SB1.1 | length 5.9
  Top Layer w0.254: J1.3@42.9,53.3 42.95,53.3 44.253,54.603 44.253,56.947 43.953,56.947 SB1.1@43,57.9
NetLED1_2: LED1.2 R2.1 | length 1.6
  Top Layer w0.254: LED1.2@43.3,48.5 43.3,47.2 R2.1@43.5,47
NetLED2_1: LED2.1 R5.2 | length 2
  Top Layer w0.254: R5.2@39.922,73.5 40.022,73.6 LED2.1@41.85,73.6
NetLED3_1: LED3.1 R6.2 | length 2
  Top Layer w0.254: R6.2@39.922,72 40.022,72.1 LED3.1@41.85,72.1
NetQ1_3: Q1.3 Q1.6 R14.1 | length 7.3
  Top Layer w0.127: Q1.6@30.975,64.755 v3(30.975,65.925)
  Top Layer w0.254: v3(28.225,66.975) 28.975,66.975 Q1.3@29.075,67.075 ; R14.1@30.869,62.744 30.975,62.85 Q1.6@30.975,64.755
  Bottom Layer w0.127: v3(28.225,66.975) 29.925,66.975 v3(30.975,65.925)
NetR5_1: R5.1 U2.9 | length 25.1
  Top Layer w0.254: v1(19.8,68) 19.8,67.5 U2.9@19.9,67.4 ; v1(21.5,74.3) 21.804,74.604 37.218,74.604 R5.1@38.322,73.5
  Bottom Layer w0.254: v1(19.8,68) 19.8,72.6 v1(21.5,74.3)
NetR7_2: R7.2 U2.12 | length 3.8
  Top Layer w0.254: R7.2@16.25,65.6 16.5,65.85 U2.12@19.975,65.85
NetR8_2: R8.2 U2.15 | length 2.8
  Top Layer w0.254: U2.15@21.7,65.125 21.7,63 R8.2@22.2,62.5
NetR9_2: R9.2 U2.16 | length 4.8
  Top Layer w0.254: R9.2@22.2,61 23,61.8 23,63.05 22.2,63.85 U2.16@22.2,65.125
NetR10_1: R10.1 U2.14 | length 6
  Top Layer w0.254: U2.14@21.2,65.125 21.2,62.8 21.4,62.6 21.4,60.3 R10.1@22.2,59.5
NetR13_2: R13.2 U2.1 | length 4.4
  Top Layer w0.254: U2.1@22.925,65.85 22.925,65.325 R13.2@25.65,62.6
NetR16_1: R16.1 SW2.3 SW2.4 | length 18
  Top Layer w0.254: SW2.3@18.05,73.1 SW2.4@26.95,73.1 29.795,73.1 30.395,72.5 30.395,70.655 R16.1@32.9,68.15
PC0_2: TP1.1 U1.8 | length 1.4
  Top Layer w0.127: U1.8@18.151,43.88 U1.8@18.18,43.88
  Top Layer w0.254: U1.8@18.18,43.88 19.1,44.8 v1(19.1,44.9)
PWR_CTL_1: R11.2 U1.42 U2.6 | length 35.1
  Top Layer w0.127: v1(24.5,71) 24.5,70.4 24.5,69.6 R11.2@24.9,70 ; U1.42@26.5,53 26.6,53 27.3,53.7 v1(27.4,53.7)
  Top Layer w0.254: U2.6@21.7,68.075 21.7,68.691 22.5,69.491 22.5,70.7 22.9,71.1 23.8,71.1 R11.2@24.5,70.4
  Bottom Layer w0.127: v1(24.5,71) 24.5,60.549 22.882,58.932 22.882,52.141 24.514,50.51 25.086,50.51 27.4,52.823 v1(27.4,53.7)
PWR_CTL_2: R12.1 U1.36 U2.5 | length 30.9
  Top Layer w0.127: U1.36@28.263,50.456 28.356,50.456 29.4,51.5 v1(29.6,51.5)
  Top Layer w0.254: U2.5@22.2,68.075 23.1,68.975 23.1,69.8 R12.1@23.3,70 v1(23.7,69.6)
  Bottom Layer w0.127: v1(23.7,69.6) 23.7,60.108 22.628,59.037 22.628,52.036 24.409,50.256 28.355,50.256 v1(29.6,51.5)
SD_CLK_2: CD1.5 TP9.1 U1.53 | length 21
  Top Layer w0.254: v1(16.85,56) 16.85,55.909 17.606,55.153 17.702,55.153 19.566,53.289 U1.53@19.566,53.284
  Bottom Layer w0.254: CD1.5@15.71,68.5 13.2,68.5 12.5,67.8 12.5,60.35 v1(16.85,56)
SD_CMD_2: CD1.3 R20.1 TP8.1 U1.54 | length 23.1
  Top Layer w0.254: R20.1@15.5,57.55 15.5,56.496 16.693,55.303 16.749,55.303 17.714,54.338 v1(17.714,54.286) 17.856,54.286 U1.54@19.212,52.931
  Bottom Layer w0.254: CD1.3@15.4,66.4 17.1,66.4 17.714,65.786 17.714,63.536 20,61.25 20,55.133 19.153,54.286 v1(17.714,54.286)
SD_DAT0_2: CD1.7 R24.1 TP7.1 U1.39 | length 39.4
  Top Layer w0.254: R24.1@12.25,72.05 13.3,71 v1(14,71) ; v1(25.4,48.8) 25.504,48.904 25.504,49.818 U1.39@27.202,51.517 28.85,53.164 30.663,53.164 TP7.1@31.3,53.801
  Bottom Layer w0.254: v1(14,71) 14.3,70.7 CD1.7@15.71,70.7 16.9,70.7 17.615,69.985 17.615,66.992 21.919,62.688 21.919,51.757 24.876,48.8 v1(25.4,48.8)
SD_DAT1_2: CD1.8 R23.1 U1.40 | length 31.8
  Top Layer w0.254: R23.1@13.5,72.05 14.45,72.05 v1(14.5,72) ; v1(24.9,49.7) 24.9,49.9 26.3,51.3 U1.40@26.4,51.3
  Bottom Layer w0.254: v1(14.5,72) 15.51,72 CD1.8@15.71,71.8 17.6,71.8 17.996,71.404 17.996,67.15 22.3,62.846 22.3,51.915 24.515,49.7 v1(24.9,49.7)
SD_DAT2_2: CD1.1 R22.1 U1.51 | length 15.2
  Top Layer w0.254: R22.1@17.5,57.55 17.5,57.5 19,56 v1@19,55.5 ; v1(18.925,55.425) 18.925,55.339 v1@19,55.264 ; U1.51@20.273,53.991 v1@19.017,55.247 ; v1@19,55.264 v1@19.017,55.247 ; v1@19,55.264 v1@19,55.5 ; v1@19,55.5 19.017,55.483 v1@19.017,55.247
  Bottom Layer w0.254: CD1.1@15.71,64.1 18.925,60.885 v1(18.925,55.425)
SD_DAT3_2: CD1.2 R21.1 U1.52 | length 18
  Top Layer w0.254: R21.1@16.5,57.55 16.5,57.5 v1@18,56 ; v1(17.856,55.757) 17.798,55.698 19.858,53.638 U1.52@19.919,53.638
  Bottom Layer w0.254: CD1.2@15.71,65.2 14.5,65.2 13.7,64.4 13.7,59.913 17.009,56.604 17.1,56.604 17.856,55.848 v1(17.856,55.757)
SD_DETECT_2: CD1.9 U1.55 | length 30.5
  Top Layer w0.254: v1(16.499,54.699) 16.499,54.647 17.463,53.682 17.753,53.682 U1.55@18.858,52.577
  Bottom Layer w0.254: CD1.9@14.1,73.8 10.3,73.8 9,72.5 9,61 15.301,54.699 v1(16.499,54.699)
SPI1_MISO_2: TP5.1 U1.22 U5_ST1.15 U5_ST2.15 U5_ST3.15 U5_ST4.15 | length 52.1
  Top Layer w0.254: TP5.1@8.131,32 8.131,31.028 v1(9.009,30.15) U5_ST4.15@10.3,30.15 ; v1(19.209,30.15) U5_ST3.15@20.5,30.15 ; U1.22@25.788,42.819 28.7,39.907 28.7,30.86 v1(29.409,30.15) U5_ST2.15@30.7,30.15 ; v1(39.609,30.15) U5_ST1.15@40.9,30.15
  Bottom Layer w0.254: v1(9.009,30.15) v1(19.209,30.15) v1(29.409,30.15) v1(39.609,30.15)
SPI1_MOSI_2: TP6.1 U1.23 U5_ST1.16 U5_ST2.16 U5_ST3.16 U5_ST4.16 | length 49.2
  Top Layer w0.254: U5_ST4.16@10.3,30.925 U5_ST4.16@10.3,30.8 10.4,30.9 v1@10.4,31.5 ; U5_ST3.16@20.5,30.8 20.6,30.9 v1(20.6,31.5) ; U1.23@26.142,43.173 28.314,41 ; TP6.1@28.564,41.25 28.314,41 ; U5_ST2.16@30.7,30.925 U5_ST2.16@30.7,30.8 ; v1(30.8,31.5) 30.8,30.9 U5_ST2.16@30.7,30.8 ; U5_ST1.16@40.9,30.925 U5_ST1.16@40.9,30.8 41,30.9 v1(41,31.5) ; 28.314,41 29.15,40.164 29.15,31.5 29.85,30.8 U5_ST2.16@30.7,30.8
  Bottom Layer w0.254: v1(10.3,31.5) v1(20.6,31.5) v1(41,31.5)
SPI1_SCK_2: TP4.1 U1.15 U5_ST1.1 U5_ST2.1 U5_ST3.1 U5_ST4.1 | length 50.7
  Top Layer w0.254: v1(3.4,30.8) U5_ST4.1@4.7,30.8 4.43,31.07 TP4.1@4.43,32.5 ; v1(13.6,30.8) U5_ST3.1@14.9,30.8 ; U1.15@20.626,41.405 19.6,40.379 19.6,39.1 24.727,33.973 U5_ST2.1@24.727,30.86 ; v1(23.8,30.8) U5_ST2.1@25.1,30.8 ; v1(34,30.8) U5_ST1.1@35.3,30.8
  Bottom Layer w0.254: v1(3.4,30.8) v1(13.6,30.8) v1(23.8,30.8) v1(34,30.8)
ST_CS#1: TP10_ST1.1 U1.29 U5_ST1.2 | length 19.8
  Top Layer w0.254: U1.29@28.263,45.294 36.788,36.769 36.788,30.713 36.225,30.15 U5_ST1.2@35.3,30.15
ST_CS#2: TP10_ST2.1 U1.20 U5_ST2.2 | length 13.5
  Top Layer w0.254: U1.20@25.081,42.112 26.3,40.893 26.3,30.425 26.025,30.15 U5_ST2.2@25.1,30.15
ST_CS#3: TP10_ST3.1 U1.16 U5_ST3.2 | length 21.7
  Top Layer w0.254: U5_ST3.2@14.9,30.15 15.825,30.15 16.95,31.275 16.95,34 v1(16.475,34.475) ; U1.16@20.98,41.051 20.3,40.372 20.3,39.5 v1(24.3,35.5)
  Bottom Layer w0.254: v1(16.475,34.475) 17,35 23.8,35 v1(24.3,35.5)
ST_CS#4: TP10_ST4.1 U1.10 U5_ST4.2 | length 22.3
  Top Layer w0.254: U5_ST4.2@4.7,30.15 5.5,30.15 6,30.65 6,34.95 13.906,42.856 17.614,42.856 17.905,42.565 18.251,42.565 U1.10@18.858,43.173
SWCLK_2: J1.4 U1.49 | length 23
  Top Layer w0.254: U1.49@20.9,54.9 22.8,56.8 v1(24,56.8) ; v1(39.825,54.775) 40.15,54.775 J1.4@41.65,53.275
  Bottom Layer w0.254: v1(24,56.8) 37.8,56.8 v1(39.825,54.775)
SWDIO_2: J1.2 U1.46 | length 18.9
  Top Layer w0.254: U1.46@25,54.3 25.853,55.153 v1(25.6,55.153) ; v1(39.755,53.855) 39.8,53.855 J1.2@41.65,52.005
  Bottom Layer w0.254: v1(25.6,55.153) 38.363,55.153 39.708,53.808 v1(39.755,53.855)
SYNC_2: TP2.1 U1.37 | length 3.7
  Top Layer w0.254: U1.37@27.909,50.809 29.25,52.15 TP2.1@31.097,52.15
USB_1_N: D1.2 J3.2 U1.44 | length 24.3
  Top Layer w0.254: U1.44@25.434,53.284 27.542,55.392 34.402,55.392 37.4,58.39 37.4,61.846 37.396,61.85 37.396,62.35 37.4,62.354 37.4,65.295 37.716,65.611 37.743,65.585 D1.2@38.15,65.585 38.557,65.585 39.122,66.15 J3.2@40.325,66.15
USB_1_P: D2.2 J3.3 U1.45 | length 25.4
  Top Layer w0.254: U1.45@25.075,53.644 27.332,55.9 34.192,55.9 36.892,58.6 36.892,65.614 37.743,66.465 D2.2@38.15,66.465 38.557,66.465 38.892,66.8 J3.3@40.325,66.8 ; U1.45@25.081,53.638 U1.45@25.517,54.074
V_LATCH: D3.1 U1.41 | length 26.6
  Top Layer w0.254: v7(24.8,51.2) 25.071,51.2 25.271,51 U1.41@26.495,52.224 ; v1(27.55,68.825) 27.55,70.075 D3.1@29.25,71.775
  Bottom Layer w0.254: v7(24.8,51.2) 24.5,51.2 23.2,52.5 23.2,58.8 25.056,60.656 25.056,66.731 27.35,69.025 v1(27.55,68.825)
VBAT: C16.2 P1.1 Q1.2 R14.2 SW2.1 SW2.2 U1.1 | length 60.2
  Top Layer w0.254: U1.1@15.676,46.355 15.676,47.176 25.8,57.3 C16.2@25.8,59.5 ; SW2.1@18.05,77.1 SW2.2@26.95,77.1 ; C16.2@25.7,59.4 C16.2@25.8,59.5 ; R14.2@29.15,62.325 R14.2@29.3,62.475 ; v1@29.25,63.5 29.15,63.4 R14.2@29.15,62.625 28.229,61.704 28.205,61.704 26.995,61.704 26.846,61.555 26.846,60.546 C16.2@25.8,59.5
  Top Layer w0.508: v1(29.15,63.5) v1@29.25,63.5 ; Q1.2@30.025,67.075 30.025,67.45 v1@30.975,68.4
  Bottom Layer w0.127: v1(29.15,63.5) 29.314,63.5 31.516,65.701 31.516,66.149 30.975,66.689 30.975,68.475 v1(31,68.5)
  Bottom Layer w0.254: v1(27.8,76.4) 31.7,72.5 P1.1@37.45,72.5
  Bottom Layer w0.508: v1(31,68.5) 33.45,68.5 P1.1@37.45,72.5
VBAT_SW: C13.2 LED3.2 Q1.4 U2.2 U2.3 | length 31.7
  Top Layer w0.254: v1(28,64.1) 28,64.68 28.075,64.755 ; 28.655,64.755 Q1.4@29.075,64.755 ; LED3.2@43.45,72.1 43.55,72 v3(44.5,72)
  Top Layer w0.508: 22.9,66.575 23.886,66.575 24.111,66.8 C13.2@25.45,66.8 27.495,64.755 28.075,64.755 28.655,64.755
  Bottom Layer w0.254: v1(28,64.1) 28,63.043 28.543,62.5 30.5,62.5 33.5,65.5 37.8,65.5 41.046,68.746 41.046,70.655 41.632,71.242 43.742,71.242 v3(44.5,72)
VBUS: C8.2 C21.2 C22.2 D3.2 F1.2 U1.48 U2.13 | length 49.2
  Top Layer w0.254: 20.5,64.1 20.7,64.3 U2.13@20.7,65.1 U2.13@20.7,65.125 ; U1.48@24.2,54.9 27.6,58.3 C22.2@27.6,59.4 ; v1(27.625,67.825) 29.25,69.45 D3.2@29.25,69.875
  Top Layer w0.508: 20.5,64.1 20.5,62.6 20.3,62.4 20.3,59.9 22.6,57.6 v7(25,57.6) ; C22.2@27.6,59.4 C21.2@29.5,59.4 v7(30.6,59.4) ; v7(39.5,58.8) 39.8,58.5 F1.2@39.8,57.8
  Bottom Layer w0.127: v1(27.625,67.825) 27.35,67.55 27.35,62.55 30.55,59.35 v7@30.6,59.3
  Bottom Layer w0.508: v7(25,57.6) 28.8,57.6 v7@30.55,59.35 ; v7(30.6,59.4) 31.2,58.8 v7(39.5,58.8)
pads on no net: D4.2 J1. J1.6 J3.4 U1.2 U1.9 U1.24 U1.25 U1.26 U1.27 U1.28 U1.34 U1.35 U1.50 U1.56 U1.57 U1.58 U1.59 U1.61 U1.62 U2.7 U5_ST1.8 U5_ST1.9 U5_ST2.8 U5_ST2.9 U5_ST3.8 U5_ST3.9 U5_ST4.8 U5_ST4.9
copper on no net: | length 1.2
  Top Layer w0.127: 20.626,54.345 20.626,54.274 21.099,53.801
  Top Layer w0.254: 11,53.3 11.504,53.3 ; 13.605,52.404 13.609,52.4
  other v6: 2.5,39 42.5,39 2.5,76.5 42.5,76.5

## Polygon pours and split planes (outlines as drawn)
GND on Bottom Layer "Bottom Layer-No Net" (solid, pour order 4): 0,79 0,0 45,0 45,79
GND on Top Layer "Top Layer-No Net" (solid, pour order 2): 0,79 0,0 45,0 45,79

## Silkscreen, mask and mechanical layers (free items; w line width, h text height)
Top Overlay:
  rectangle: 3.4,9 8,11
  rectangle: 14.6,9 19.2,11
  rectangle: 25.8,9 30.4,11
  rectangle: 37,9 41.6,11
  text "RESET" at 34.9,47.6 h1
  text "StrainLogger" at 11.286,36.425 h5
  text "-" at 0.9,13.9 h2.54
  text "-" at 12.1,13.9 h2.54
  text "-" at 23.3,13.9 h2.54
  text "-" at 34.5,13.9 h2.54
  text "+" at 8.5,13.8 h2.54
  text "+" at 19.7,13.8 h2.54
  text "+" at 30.9,13.8 h2.54
  text "+" at 42.1,13.8 h2.54
  text "N" at 3.6,13.4 h2
  text "P" at 6.2,13.4 h2
  text "N" at 14.8,13.4 h2
  text "P" at 17.4,13.4 h2
  text "N" at 26,13.4 h2
  text "P" at 28.6,13.4 h2
  text "N" at 37.2,13.4 h2
  text "P" at 39.8,13.4 h2
  text "4" at 0.8,11.3 h2.2
  text "3" at 12.1,11.2 h2.2
  text "2" at 23.3,11.2 h2.2
  text "1" at 34.5,11.2 h2.2
Bottom Overlay:
  rectangle: 36.8,10.9 41.8,13.1
  rectangle: 25.6,10.9 30.6,13.1
  rectangle: 14.4,10.9 19.4,13.1
  rectangle: 3.2,10.9 8.2,13.1
  text "J. Stepanian" at 15.5,75.7 h2
  text "CHRG" at 44.587,73.3 h1.25
  text "PWR" at 44.45,71.55 h1.25
  text "STATUS" at 44.244,47.575 h1.25
  text "REV003" at 1.4,19.1 h1.25 r270
  text "+" at 44.258,14.4 h2.54
  text "-" at 36.658,14.3 h2.54
  text "+" at 10.058,14.1 h2.54
  text "+" at 21.258,14.1 h2.54
  text "+" at 32.458,14.1 h2.54
  text "-" at 2.458,14 h2.54
  text "-" at 13.658,14 h2.54
  text "-" at 24.858,14 h2.54
  text "N" at 38.958,13.9 h2
  text "P" at 41.558,13.9 h2
  text "N" at 4.758,13.6 h2
  text "P" at 7.358,13.6 h2
  text "N" at 15.958,13.6 h2
  text "P" at 18.558,13.6 h2
  text "N" at 27.158,13.6 h2
  text "P" at 29.758,13.6 h2
  text "5" at 44.4,11.4 h2.2
  text "8" at 10.7,11.3 h2.2
  text "7" at 21.9,11.3 h2.2
  text "6" at 33.1,11.3 h2.2
Board Outline:
  the board outline again, w0.1

## Text inside footprints (layer, text, board x,y; h text height)
J3: Top 3D "Board Edge" at 44.905,65.233 h0.3 r90
SW1: Top Footprint Info "REV: 01" at 33.85,46.5 h0.25 r270
U1: Top Overlay "1" at 14.722,46.39 h1.2 r315; Mechanical 27 "64" at 15.358,50.597 h0.8 r225; Mechanical 27 "49" at 20.644,55.883 h0.8 r225; Mechanical 27 "48" at 25.222,55.052 h0.8 r135; Mechanical 27 "33" at 30.526,49.749 h0.8 r135; Mechanical 27 "32" at 29.677,45.153 h0.8 r45; Mechanical 27 "17" at 24.427,39.867 h0.8 r45; Mechanical 27 "16" at 19.848,40.663 h0.8 r315; Mechanical 27 "1" at 14.793,45.683 h0.8 r315